# Altium PCB StepperDriver.PcbDoc
Units mil, origin at the board's own origin, x right, y up, seen from the top; angles counter-clockwise.
Board outline 6000 x 4000 mil, 2 copper layers (Top Layer, Bottom Layer); 12 components, 11 nets, 59 pads, 0 vias.
Unrouted connection lines stored in the file: 24.
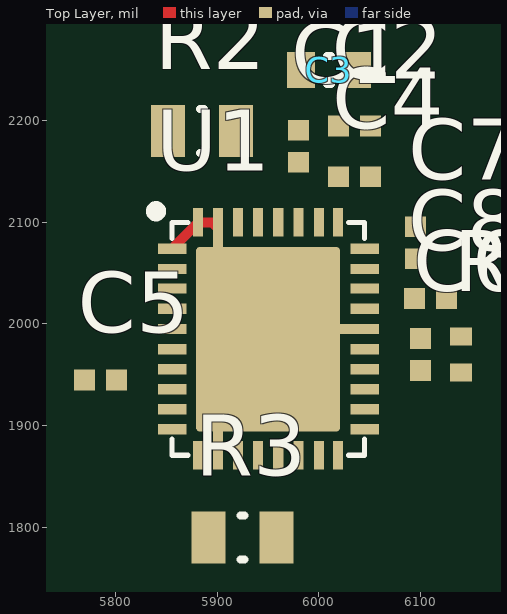
[diagram p0: Top Layer view]
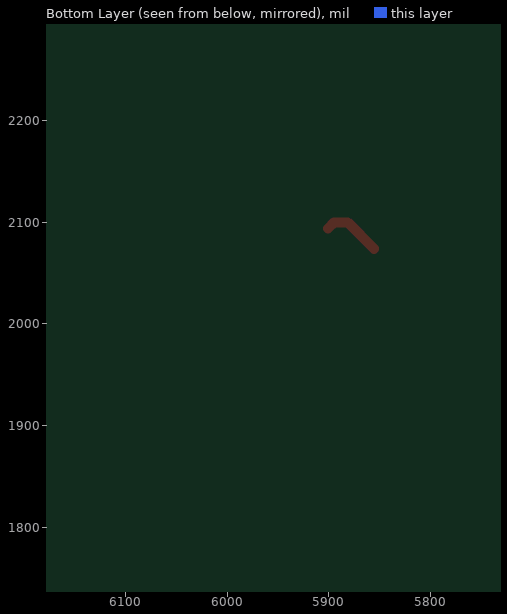
[diagram p1: Bottom Layer view, seen from below]

## Layer stack, top to bottom
Top Solder: solder mask 0.4, Solder Resist, Dk 3.5
Top Layer: signal copper 1.4
Dielectric 1: dielectric 12.6, FR-4, Dk 4.8
Bottom Layer: signal copper 1.4
Bottom Solder: solder mask 0.4, Solder Resist, Dk 3.5

## Board outline
1000,1000 7000,1000 7000,5000 1000,5000

## Design rules (kind name [scope] priority, off if disabled: settings)
Clearance [All] p1: gap=10
PolygonConnect [All] p1: connectstyle=Relief reliefconductorwidth=10 reliefentries=4 polygonreliefangle="90 Angle" airgapwidth=10
RoutingVias [All] p1: holewidth=28 width=50 viastyle="Through Hole" minholewidth=28 minwidth=50 maxholewidth=28 maxwidth=50
SolderMaskExpansion [All] p1: expansion=4
Width [All] p1: maxlimit=10 minlimit=10 preferedwidth=10
30 further rules are at their usual default settings.

## Components (designator, comment, footprint, x,y, rotation, side; value= is the part's Value field where it differs from the comment)
C1 "100nF" CAPC0402(1005)60_L 5980,2175 r90 top
C2 "100nF" CAPC0402(1005)60_L 6035,2195 r0 top
C3 "1uF" CAPC0603(1608)100_L 6010,2250 r0 top
C4 "22nF" CAPC0402(1005)60_L 6035,2145 r180 top
C5 "100nF" CAPC0402(1005)60_L 5785,1945 r0 top
C6 "4.7uF" CAPC0402(1005)60_L 6100,1970 r90 top
C7 "CAP 22nF 50V 0402(1005)" CAPC0402(1005)60_L 6095,2080 r90 top
C8 "470nF" CAPC0402(1005)60_L 6110,2025 r180 top
R1 "2R2" RESC0402(1005)_L 6140,1970 r270 top
R2 "0R27" RESC0805(2012)_L 5885,2190 r0 top
R3 "0R27" RESC0805(2012)_L 5925,1790 r0 top
U1 "TMC2100_QFN36" QFN36 5950,1985 r0 top

## Footprints (in the part's own frame and the unit in brackets; to place one, negate y for a bottom-side part, rotate by r counter-clockwise, add the part's x,y. Pads: shape width x height; smd on the part's side, far side on the other; paste and mask are expansions set on the pad)
CAPC0402(1005)60_L [mm] "Chip Capacitor, Body 1.0x0.5mm, Height 0.6mm, IPC High Density"
  rect 0.52x0.52 smd: 1(-0.4,0) 2(0.4,0)
  body extent -0.55,-0.3 0.55,0.3, height 0.6
CAPC0603(1608)100_L [mm] "Chip Capacitor, Body 1.6x0.8mm, Height 1.0mm, IPC High Density"
  rect 0.7x0.9 smd: 1(-0.7,0) 2(0.7,0)
  silkscreen extent -0.05,-0.35 0.05,0.35, body extent -0.87,-0.47 0.88,0.48, height 1
QFN36 [mil]
  rect 28x10 smd: 1(-94.49,89) 2(-94.49,69) 3(-94.49,50) 4(-94.49,30) 5(-94.49,10) 6(-94.49,-9.84) 7(-94.49,-29.53) 8(-94.49,-49.21) 9(-94.49,-68.9) 10(-94.49,-88.58) 19(95,-88.58) 20(95,-68.9) 21(95,-49.21) 22(95,-29.53) 23(95,-9.84) 25(95,30) 26(95,50) 27(95,69) 28(95,89)
  rect 10x28 smd: 11(-68.9,-114.17) 13(-29.53,-114.17) 14(-9.84,-114.17) 15(10,-114.17) 16(30,-114.17) 17(50,-114.17) 18(69,-114.17) 29(69,115) 30(50,115) 31(30,115) 32(10,115) 33(-9.84,115) 34(-29.53,115) 36(-68.9,115)
  rect 10x40 smd: 12(-49.21,-108.27) 35(-49.21,109)
  rect 40x10 smd: 24(89,10)
  rrect6% 142x182 smd: GND_PAD(0,0)
  silkscreen extent -115,-114 95,131
RESC0402(1005)_L [mm] "Chip Resistor, Body 1.0x0.5mm, IPC High Density"
  rect 0.45x0.55 smd: 1(-0.45,0) 2(0.45,0)
  body extent -0.52,-0.27 0.53,0.28, height 0.4
RESC0805(2012)_L [mm] "Chip Resistor, Body 2.0x1.3mm, IPC High Density"
  rect 0.85x1.3 smd: 1(-0.85,0) 2(0.85,0)
  silkscreen extent -0.05,-0.55 0.05,0.55, body extent -1.1,-0.67 1.1,0.68, height 0.7

## Part data
C1 C2 C5: library part CMP-1034-02077-1, "CAP 100nF 50V ±10% 0402 (1005 Metric) Thickness 0.6mm SMD"
C3: library part CMP-1035-02745-1, "CAP 1uF 50V ±10% 0603 (1608 Metric) Thickness 1mm SMD"
C4 C7: library part CMP-1034-01957-1, "CAP 22nF 50V ±5% 0402 (1005 Metric) Thickness 0.6mm SMD"
C6: library part CMP-1034-02127-1, "CAP 2.2uF 10V ±10% 0402 (1005 Metric) Thickness 0.6mm SMD"
C8: library part CMP-1034-02106-1, "CAP 470nF 10V ±10% 0402 (1005 Metric) Thickness 0.6mm SMD"
R1: library part CMP-1011-00010-1, "2R2 0.063W 5% 0402 (1005 Metric)  SMD"
R2 R3: library part CMP-1013-00001-1, "Jumper 0805 (2012 Metric)"

## Nets (pads, with @x,y where several pads share a name; then routed paths per layer and width w, separated by ;. In a path a pad name is that pad's centre, name@x,y a point inside that pad or via, vN(x,y) a via of type N, cw(c..) or ccw(c..) an arc to the next point about the centre after c; other vN are vias at no path point)
GND: C1.2 C2.2 C3.2 C5.1 C6.1 C8.1 R2.1 R3.1 U1.1 U1.10 U1.11 U1.12 U1.24 U1.35 U1.36 U1.GND_PAD | length 58.5
  Top Layer w10: U1.1 5881.51,2100 5894.79,2100 U1.35
NetC1_1: C1.1 U1.30
NetC2_1: C2.1 C3.1 U1.16 U1.31
NetC4_1: C4.1 U1.29
NetC5_2: C5.2 U1.8
NetC6_2: C6.2 R1.2 U1.25
NetC7_1: C7.1 U1.27
NetC7_2: C7.2 U1.28
NetC8_2: C8.2 R1.1 U1.26
NetR2_2: R2.2 U1.33
NetR3_2: R3.2 U1.14
pads on no net: C4.2 U1.2 U1.3 U1.4 U1.5 U1.6 U1.7 U1.9 U1.13 U1.15 U1.17 U1.18 U1.19 U1.20 U1.21 U1.22 U1.23 U1.32 U1.34